# Altium PCB COURONNE PARTIE II PCB.PCBDOC
Units mil, origin at the board's own origin, x right, y up, seen from the top; angles counter-clockwise.
Board outline 11800 x 7870 mil, 2 copper layers (Top Layer, Bottom Layer); 7 components, 6 nets, 24 pads, 0 vias.
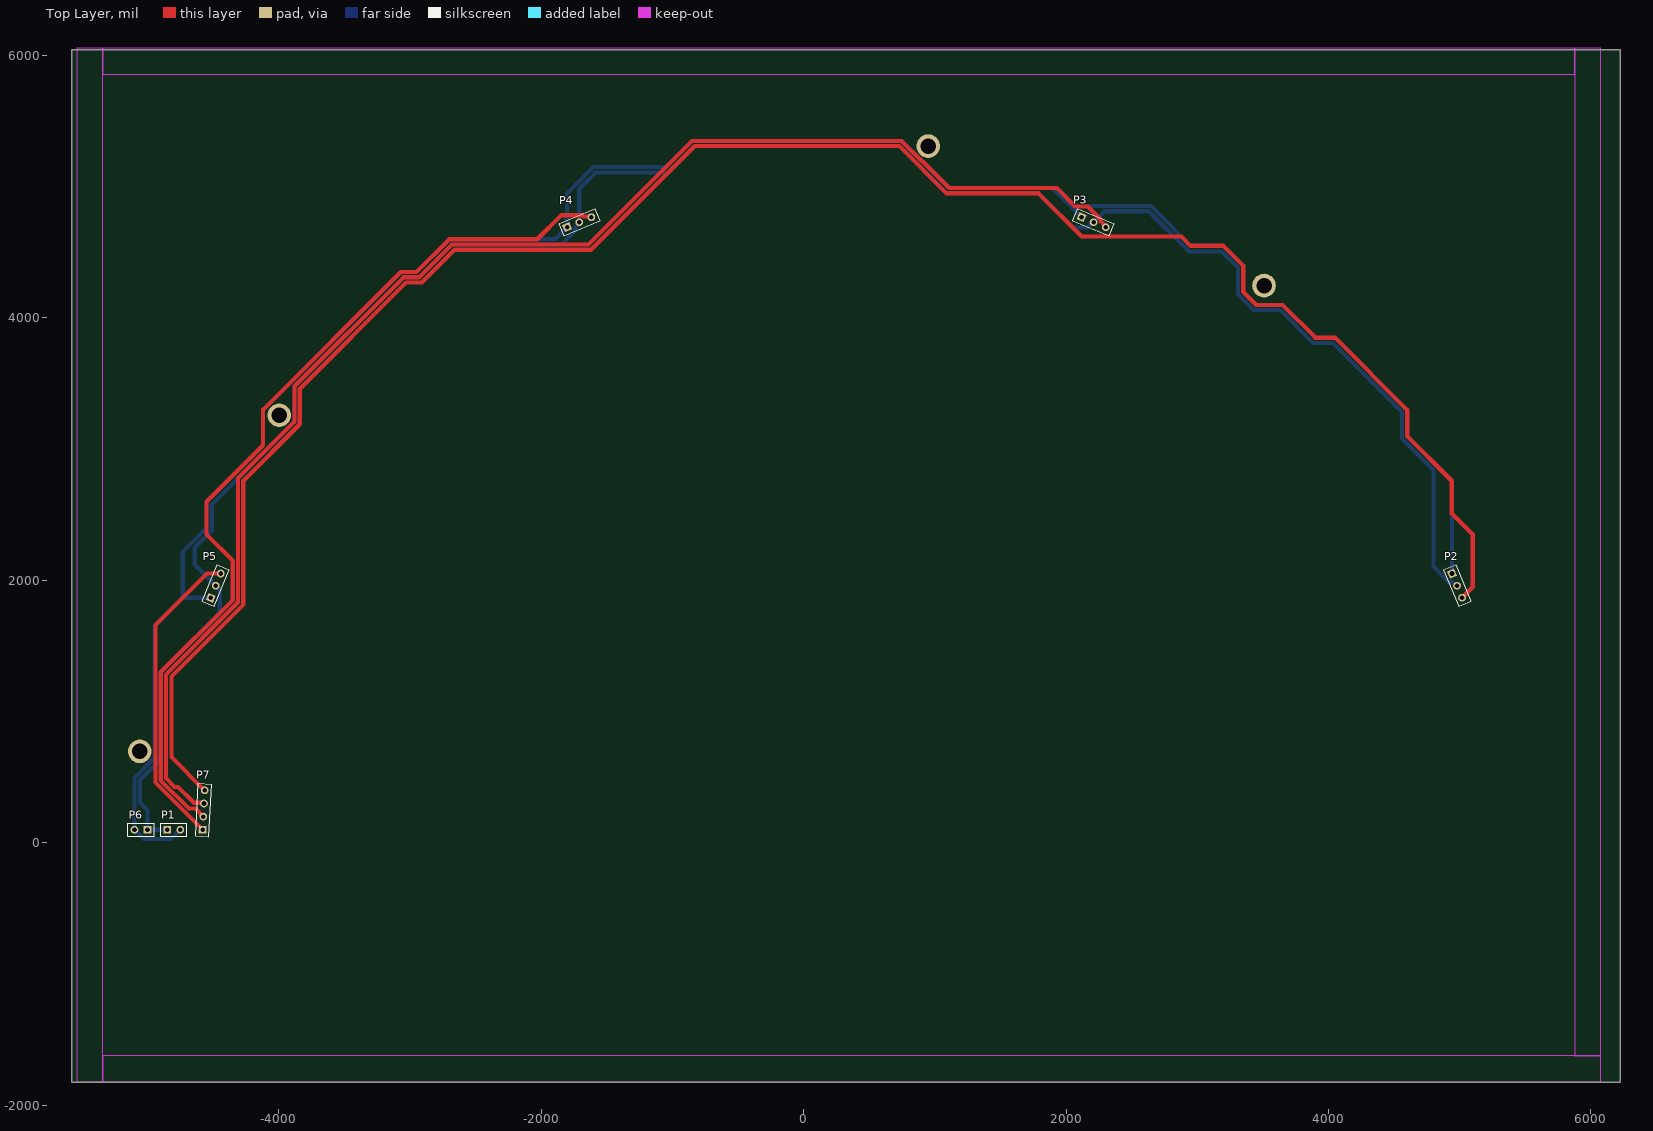
[diagram p0: Top Layer view]
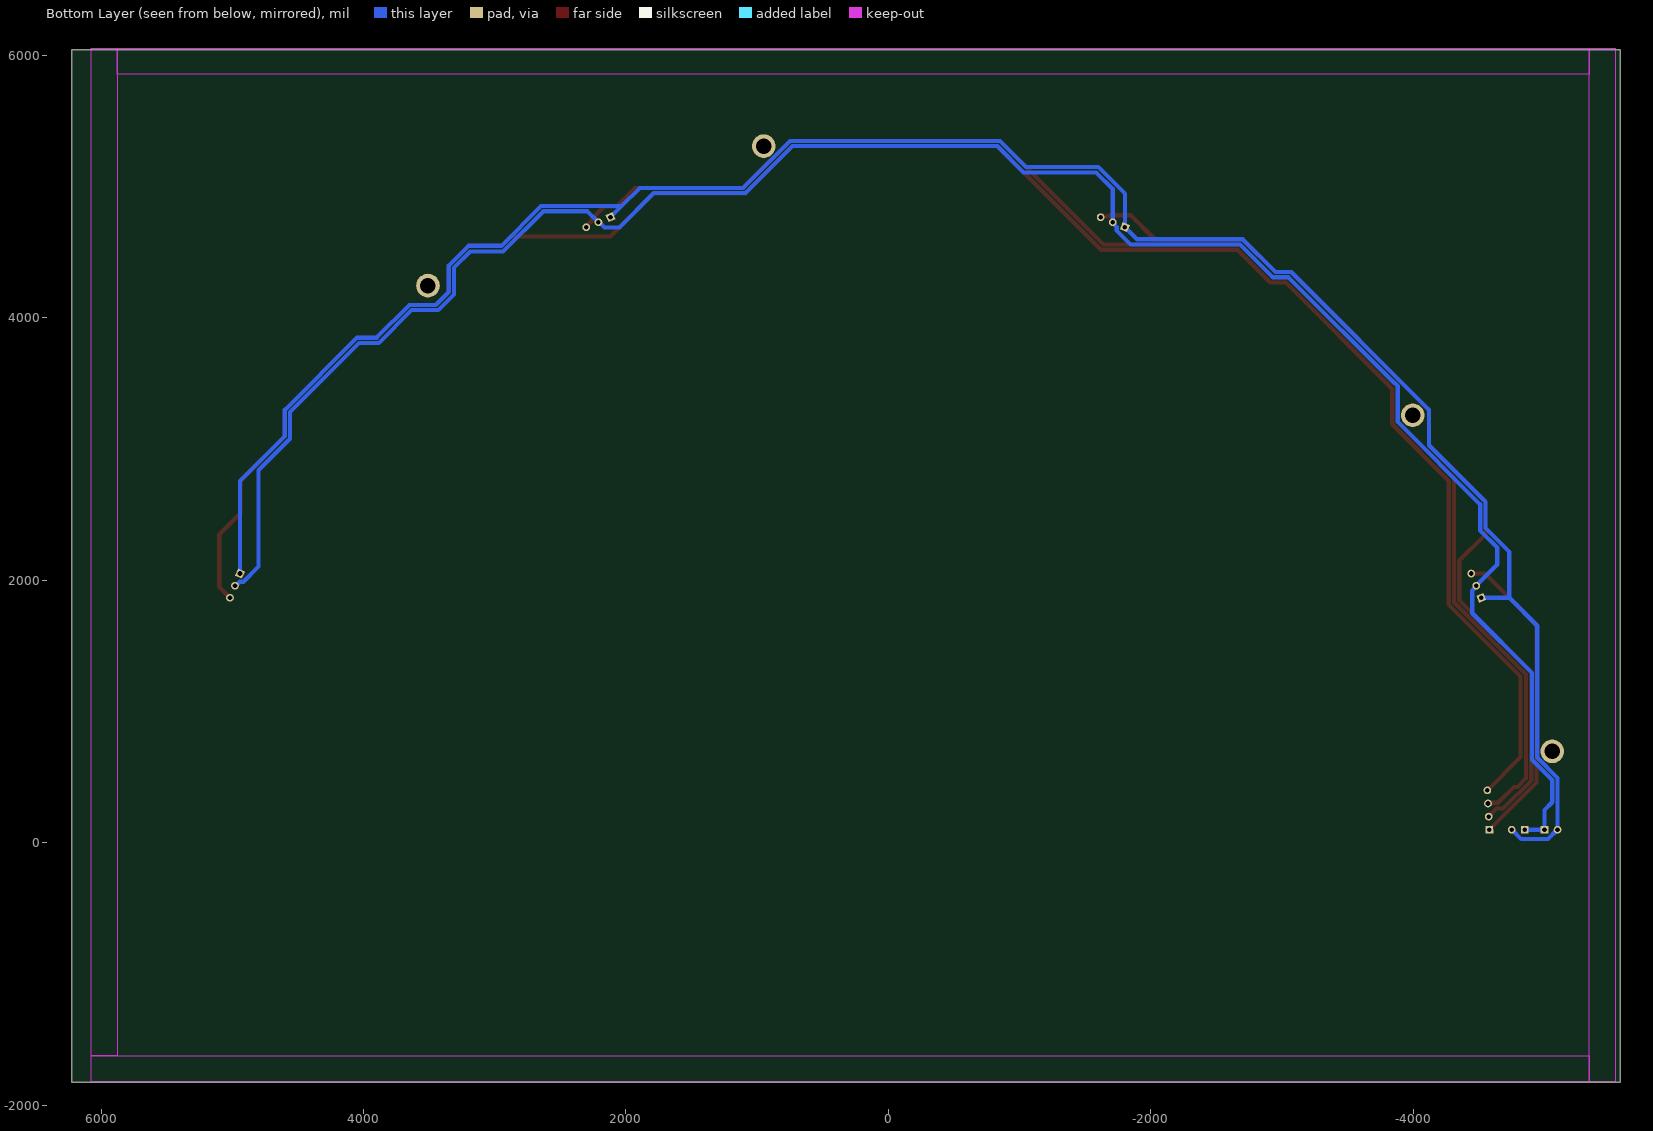
[diagram p1: Bottom Layer view, seen from below]

## Layer stack, top to bottom
Top Solder: solder mask 0.4, Solder Resist, Dk 3.5
Top Layer: signal copper 1.4
Dielectric1: dielectric 12.6, FR-4, Dk 4.8
Bottom Layer: signal copper 1.4
Bottom Solder: solder mask 0.4, Solder Resist, Dk 3.5

## Board outline
-5576.97,-1826.38 6223.03,-1826.38 6223.03,6043.62 -5576.97,6043.62

## Design rules (kind name [scope] priority, off if disabled: settings)
Clearance Clearance_bottom_polygon [OnLayer('Bottom Layer') Or OnLayer('Multi-Layer') vs OnLayer('Bottom Layer')  And  InPoly] p1: gap=20 ignorepadtopadclearanceinfootprint=FALSE except(0: Arc-Hole Track-Hole SMDPad-Hole THPad-Hole Via-Hole Fill-Hole Poly-Hole Region-Hole Text-Hole)
Clearance Clearance_bottom_polygon_keepout [OnLayer('Bottom Layer') Or OnLayer('Multi-Layer') Or InPoly vs OnLayer('Keepout')] p2: gap=0 ignorepadtopadclearanceinfootprint=FALSE
Clearance Clearance_top_polygon [OnLayer('Top Layer')  Or OnLayer('Multi-Layer') vs OnLayer('Top Layer') And InPoly] p3: gap=20 ignorepadtopadclearanceinfootprint=FALSE except(0: Arc-Hole Track-Hole SMDPad-Hole THPad-Hole Via-Hole Fill-Hole Poly-Hole Region-Hole Text-Hole)
Clearance Clearance_bottom [OnLayer('Bottom Layer') Or OnLayer('Multi-Layer') vs OnLayer('Bottom Layer')  And Not InPoly] p4: gap=8 ignorepadtopadclearanceinfootprint=FALSE except(0: Arc-Hole Track-Hole SMDPad-Hole THPad-Hole Via-Hole Fill-Hole Poly-Hole Region-Hole Text-Hole)
Clearance Clearance_top [OnLayer('Top Layer')  Or OnLayer('Multi-Layer') vs OnLayer('Top Layer') And Not InPoly] p5: gap=8 ignorepadtopadclearanceinfootprint=FALSE except(0: Arc-Hole Track-Hole SMDPad-Hole THPad-Hole Via-Hole Fill-Hole Poly-Hole Region-Hole Text-Hole)
Clearance Clearance_pad_to_pad [OnLayer('Multi-Layer') vs OnLayer('Multi-Layer')] p6: gap=10 ignorepadtopadclearanceinfootprint=FALSE except(0: Arc-Hole Track-Hole SMDPad-Hole THPad-Hole Via-Hole Fill-Hole Poly-Hole Region-Hole Text-Hole)
ComponentClearance ComponentClearance_bottom [OnLayer('Bottom Overlay') vs OnLayer('Bottom Overlay')] p1: gap=0 collisioncheckmode=3 verticalgap=10 showdistances=FALSE
ComponentClearance ComponentClearance_top [OnLayer('Top Overlay') vs OnLayer('Top Overlay')] p2: gap=0 collisioncheckmode=3 verticalgap=10 showdistances=FALSE
FabricationTestPointUsage TestPointUsage [All] p1: valid=0 allowmultiple=FALSE
FabricationTestpoint Testpoint [All] p1: side=3 testpointundercomponent=TRUE minsize=40 maxsize=100 preferedsize=60 minholesize=0 maxholesize=40 preferedholesize=32 testpointgrid=1 allowsidetop=TRUE allowsidebottom=TRUE usegrid=TRUE gridtolerance=0.01
HoleSize [All] p1: absolutevalues=TRUE maxlimit=1000 minlimit=16 maxpercent=80.000 minpercent=20.000
MinimumAnnularRing [PadXSize_AllLayers = PadYSize_AllLayers] p1: minimumring=10
PermittedLayers [All] p1: toplayerpermitted=TRUE bottomlayerpermitted=TRUE
PolygonConnect [All] p1: connectstyle=Relief reliefconductorwidth=24 reliefentries=4 polygonreliefangle="90 Angle" airgapwidth=10
RoutingVias [All] p1: holewidth=16 width=50 viastyle="Through Hole" minholewidth=16 minwidth=36 maxholewidth=1000 maxwidth=1000
SMDToPlane [All] p1: distance=0
SolderMaskExpansion [All] p1: expansion=4 istentingtop=FALSE
ViasUnderSMD [All] p1: allowed=FALSE
Width Width_botom_top [OnLayer('Bottom Layer') or OnLayer('Top Layer')] p1: maxlimit=10000 minlimit=10 preferedwidth=32
26 further rules are at their usual default settings.

## Components (designator, comment, footprint, x,y, rotation, side; value= is the part's Value field where it differs from the comment)
P1 "Header 5" HDR1X2 -4850,100 r0 top
P2 "Header 3" HDR1X3 4941.73,2052.39 r292.5 top
P3 "Header 3" HDR1X3 2117.61,4768.27 r337.5 top
P4 "Header 3" HDR1X3 -1802.39,4691.73 r22.5 top
P5 "Header 3" HDR1X3 -4518.27,1867.61 r67.5 top
P6 "Header 2" HDR1X2 -5000,100 r180 top
P7 "Header 4" HDR1X4 -4580.47,100.27 r87 top

## Footprints (in the part's own frame and the unit in brackets; to place one, negate y for a bottom-side part, rotate by r counter-clockwise, add the part's x,y. Pads: shape width x height; smd on the part's side, far side on the other; paste and mask are expansions set on the pad)
HDR1X2 [mm] "Connector; Header; 2 Position"
  rect 1.5x1.5 hole 0.9: 1(0,0)
  round 1.5 hole 0.9: 2(2.54,0)
  silkscreen extent -1.27,-1.27 3.81,1.27
HDR1X3 [mm] "Connector; Header; 3 Position"
  rect 1.5x1.5 hole 0.9: 1(0,0)
  round 1.5 hole 0.9: 2(2.54,0) 3(5.08,0)
  silkscreen extent -1.27,-1.27 6.35,1.27
HDR1X4 [mm] "Connector; Header; 4 Position"
  rect 1.5x1.5 hole 0.9: 1(0,0)
  round 1.5 hole 0.9: 2(2.54,0) 3(5.08,0) 4(7.62,0)
  silkscreen extent -1.27,-1.27 8.89,1.27

## Part data
P1: library part "Header 2", "Header, 2-Pin", LatestRevisionDate=17-Jul-2002, LatestRevisionNote="Re-released for DXP Platform.", Publisher="Altium Limited"
P2 P3 P4 P5: "Header, 3-Pin", LatestRevisionDate=17-Jul-2002, LatestRevisionNote="Re-released for DXP Platform.", Publisher="Altium Limited"
P6: "Header, 2-Pin", LatestRevisionDate=17-Jul-2002, LatestRevisionNote="Re-released for DXP Platform.", Publisher="Altium Limited"
P7: "Header, 4-Pin", LatestRevisionDate=17-Jul-2002, LatestRevisionNote="Re-released for DXP Platform.", Publisher="Altium Limited"

## Free pads (board coordinates)
  round 180 hole 118.35: ""(-5059.13,697.34) ""(-3996.5,3258.66) ""(949.43,5310.18) ""(3508.85,4247.25)

## Nets (pads, with @x,y where several pads share a name; then routed paths per layer and width w, separated by ;. In a path a pad name is that pad's centre, name@x,y a point inside that pad or via, vN(x,y) a via of type N, cw(c..) or ccw(c..) an arc to the next point about the centre after c; other vN are vias at no path point)
"Capteur 1": P2.3 P7.4 | length 15399.9
  Top Layer w32: P7.4 -4818.43,653.53 -4818.43,1268.43 -4270,1816.86 -4270,2760 -3840,3190 -3840,3460 -3030,4270 -2910,4270 -2660,4520 -1620,4520 -830,5310 730,5310 1090,4950 1790,4950 2120,4620 2880,4620 2950,4550 3200,4550 3350,4400 3350,4200 3450,4100 3650,4100 3900,3850 4050,3850 4600,3300 4600,3100 4940,2760 4940,2510 5100,2350 5100,1949.34 P2.3
"Capteur 2": P3.3 P7.3 | length 11005.2
  Top Layer w32: P7.3 -4575.18,305.18 -4646.5,305.18 -4767.79,426.47 -4793.53,426.47 -4860,492.94 -4860,1283.43 -4310,1833.43 -4310,2780 -3880,3210 -3880,3480 -3050,4310 -2930,4310 -2680,4560 -1640,4560 -850,5350 746.57,5350 900.39,5196.18 903.82,5196.18 1110,4990 1930,4990 2070,4850 2165.7,4850 2263.53,4752.17 2263.53,4737.91 2302.39,4699.05 P3.3
"Capteur 3": P4.3 P7.2 | length 6874.8
  Top Layer w32: P7.2 -4635.86,260.76 -4684.39,260.76 -4900,476.38 -4900,1300 -4350,1850 -4350,2150 -4550,2350 -4550,2600 -4120,3030 -4120,3300 -3070,4350 -2950,4350 -2700,4600 -2030,4600 -1846.47,4783.53 -1687.83,4783.53 -1677.75,4773.45 -1622.79,4773.45 P4.3
"Capteur 4": P5.3 P7.1 | length 2369.4
  Top Layer w32: P7.1 -4940,459.81 -4940,1660 -4547.61,2052.39 P5.3
GND: P1.1 P2.2 P3.2 P4.2 P5.2 P6.1 | length 16147.1
  Bottom Layer w32: P1.1 P6.1 -5000,250 -5059.34,309.34 -5059.34,479.34 -4905.13,633.55 -4905.13,1294.87 -4450,1750 -4450,1922.68 -4480,1952.68 P5.2 -4640,2120 -4640,2250 -4510,2380 -4510,2580 -3882.5,3207.5 -3882.5,3480.93 -3856.72,3506.72 -3853.28,3506.72 -3050,4310 -2930,4310 -2680,4560 -1845.62,4560 -1739.81,4665.81 -1739.81,4692.87 -1710,4722.68 P4.2 -1710,4983.43 -1583.43,5110 -1030,5110 -830,5310 730,5310 1088.29,4951.71 1788.29,4951.71 2050,4690 2162.68,4690 2202.68,4730 P3.2 2292.94,4812.94 2630,4812.94 2936.22,4506.72 3186.72,4506.72 3310,4383.43 3310,4180 3430,4060 3633.43,4060 3883.43,3810 4033.43,3810 4560,3283.43 4560,3080 4800,2840 4800,2105.62 4915.81,1989.81 4942.87,1989.81 4972.68,1960 P2.2
VCC: P1.2 P2.1 P3.1 P4.1 P5.1 P6.2 | length 16422.3
  Bottom Layer w32: P1.2 -4752.59,100 -4822.59,30 -5027.41,30 -5097.41,100 P6.2 -5100,495.25 -4945.13,650.12 -4945.13,1654.87 -4732.39,1867.61 ; P5.1 -4732.39,1867.61 ; P3.1 2032.94,4852.94 ; P2.1 4941.73,2758.27 4600,3100 4600,3300 4050,3850 3900,3850 3650,4100 3450,4100 3350,4200 3350,4400 3200,4550 2950,4550 2647.06,4852.94 2032.94,4852.94 ; -4732.39,1867.61 -4732.39,2217.61 -4550,2400 -4550,2600 -4120,3030 -4120,3300 -3070,4350 -2950,4350 -2700,4600 -1894.12,4600 P4.1 -1802.39,4947.61 -1600,5150 -1050,5150 -850,5350 748.39,5350 1106.67,4991.71 1894.17,4991.71 2032.94,4852.94

## Keep-outs
Keep-Out Layer:
  rectangle: -5539.17,-1819.28 -5342.32,6054.73
  rectangle: -5342.32,-1819.28 6075,-1622.43
  rectangle: 5878.15,-1622.43 6075,6054.73
  rectangle: -5342.32,5857.88 5878.15,6054.73

## Silkscreen, mask and mechanical layers (free items; w line width, h text height)
Mechanical 1:
  lines w10: -5261.81,0 cw(c250,0) 5761.81,0 4974.41,0 ccw(c250,0) -4474.41,0 -5261.81,0
Mechanical 32:
  text "Les bandes en violet delimitent la surface utilisable...." at -5030,6634 h200
  text "Mais vous n'etes pas obliges de tout utiliser!!" at -4330,6218 h200
  text "ATTENTION:" at 6521,5481 h200
  text "Par defaut, les pistes" at 6521,5071 h200
  text "ont 32mil de largeur" at 6516,4693 h200
  text "En cas de besoin, cette largeur" at 6527,4331 h200
  text "peut etre reduite jusqu'a 10 mil" at 6516,3923 h200
  text "Par defaut, les vias" at 6544,3224 h200
  text "ont un diam. de 50 mil" at 6538,2824 h200
  text "En cas de besoin, ce diam." at 6504,2348 h200
  text "peut etre reduit jusqu'a 36 mil" at 6528,1918 h200